# Altium PCB 1U 显示.PcbDoc
Units mil, origin at the board's own origin, x right, y up, seen from the top; angles counter-clockwise.
Board outline 5905.51 x 1456.69 mil, 4 copper layers (Top Layer, Layer 1, Layer 2, Bottom Layer), stack 70.211 mil thick; 52 components, 122 nets, 445 pads, 525 vias.
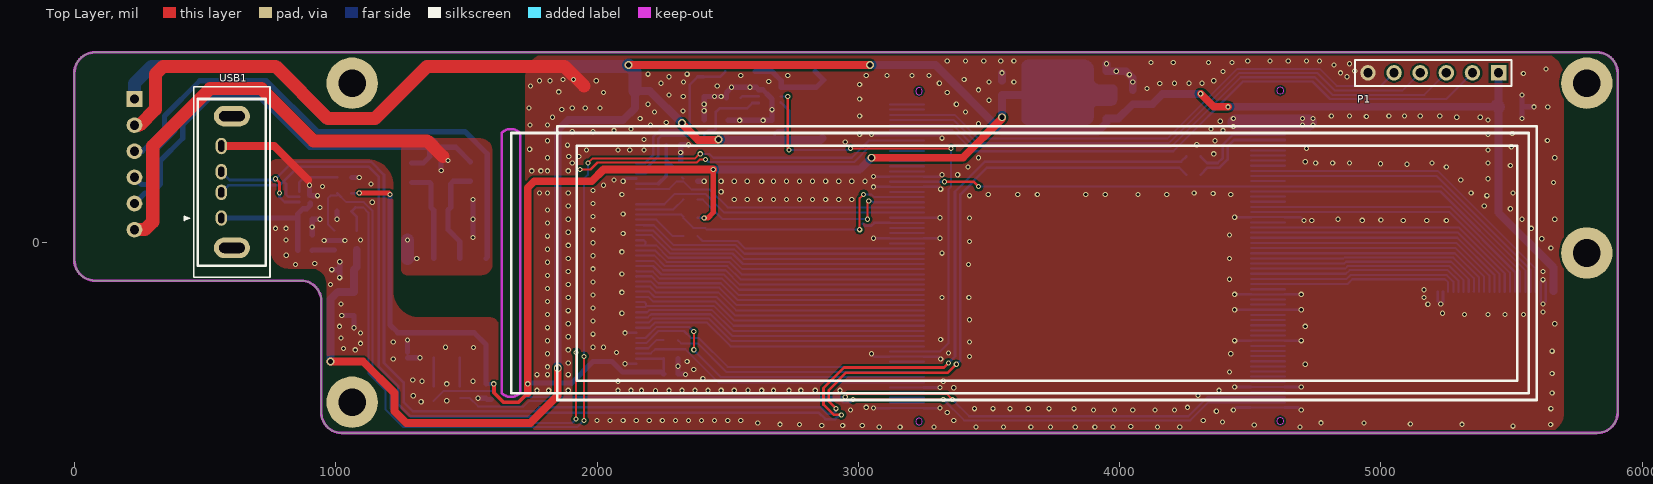
[diagram p0: Top Layer view]
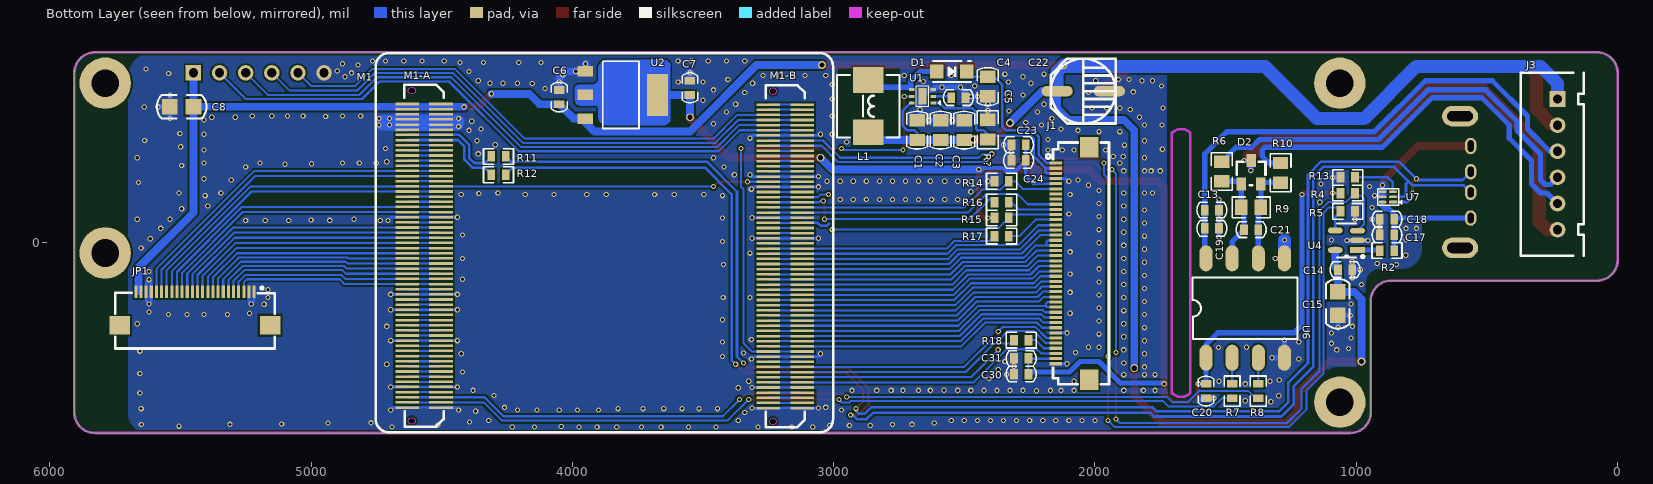
[diagram p1: Bottom Layer view, seen from below]

## Layer stack, top to bottom
Top Solder: solder mask 0.4, Solder Resist, Dk 3.5
Top Layer: signal copper 1.4
Dielectric 2: prepreg 2.8, PP-006, Dk 4.1
Layer 1: signal copper 1.378
Dielectric 1: dielectric 59.0551, FR-4, Dk 4.8
Layer 2: signal copper 1.378
Dielectric 3: prepreg 2.8, PP-006, Dk 4.1
Bottom Layer: signal copper 1.4
Bottom Solder: solder mask 0.4, Solder Resist, Dk 3.5

## Board outline
944.88,-223.74 ccw(c866.14,-223.74) 866.14,-145 78.74,-145 cw(c78.74,-66.26) 0,-66.26 0,649.61 cw(c78.74,649.61) 78.74,728.35 5826.77,728.35 cw(c5826.77,649.61) 5905.51,649.61 5905.51,-649.61 cw(c5826.77,-649.61) 5826.77,-728.35 1023.62,-728.35 cw(c1023.62,-649.61) 944.88,-649.61

## Design rules (kind name [scope] priority, off if disabled: settings)
Clearance [All] p1: gap=8 ignorepadtopadclearanceinfootprint=TRUE
DiffPairsRouting [All] p1: maxlimit=15 minlimit=10 mostfreqgap=10 toplayer_minwidth=10 toplayer_maxwidth=20 toplayer_prefwidth=15 midlayer1_minwidth=10 midlayer1_maxwidth=20 midlayer1_prefwidth=15 midlayer2_minwidth=10 midlayer2_maxwidth=20 midlayer2_prefwidth=15 bottomlayer_minwidth=10 bottomlayer_maxwidth=20 bottomlayer_prefwidth=15 maxuncoupledlength=500
HoleSize [All] p1: absolutevalues=TRUE maxlimit=300 minlimit=0 maxpercent=80.000 minpercent=20.000
HoleToHoleClearance [All] p1: gap=8 allowstackedmicrovias=TRUE
MatchedLengths can [InNetClass('CAN')] p1: tolerance=10 checknetsindiffpair=FALSE checkdiffpairvsdiffpair=TRUE checkxsignals=TRUE checkothers=TRUE
MinimumSolderMaskSliver [All] p1: minsoldermaskwidth=1
PlaneConnect [All] p1: pad.planeconnectstyle=Relief pad.reliefexpansion=20 pad.reliefentries=4 pad.reliefconductorwidth=10 pad.reliefairgap=10 via.planeconnectstyle=Direct via.reliefexpansion=20 via.reliefentries=4 via.reliefconductorwidth=10 via.reliefairgap=10
PolygonConnect [All] p1: connectstyle=Direct reliefconductorwidth=10 reliefentries=4 polygonreliefangle="90 Angle" airgapwidth=10
RoutingVias [All] p1: holewidth=12 width=20 viastyle="Through Hole" minholewidth=8 minwidth=12 maxholewidth=28 maxwidth=50
SilkToSilkClearance [All] p1: silktosilkclearance=0
SilkToSolderMaskClearance [IsPad] p1: minsilkscreentomaskgap=0 clearancetoexposedcopper=TRUE
SolderMaskExpansion [All] p1: expansion=4 istentingtop=FALSE
Width [All] p1: maxlimit=100 minlimit=8 preferedwidth=10
23 further rules are at their usual default settings.

## Classes and differential pairs
net class USB1: USB_H_D_N USB_H_D_P
net class CAN: CAN_N CAN_P
differential pair CAN: +CAN_P -CAN_N
differential pair USB_H_D: +USB_H_D_P -USB_H_D_N

## Components (designator, comment, footprint, x,y, rotation, side; value= is the part's Value field where it differs from the comment)
C1 "22uF 16V" C0805-M 2680.83,393.19 r90 bottom
C2 "10uF 25V" C0805-M 2590.83,393.19 r90 bottom
C3 "100nF 50V" C0805-M 2500.83,393.19 r90 bottom
C4 "10uF 25V" C0805-M 2410,635 r270 bottom
C5 "100nF 50V" C0603 2550,555 r0 bottom
C6 "10uF 10V" C0603 4050,530 r270 bottom
C7 "10uF 10V" C0603 3550,565 r270 bottom
C8 "10uF 25V" C0805 5450,520 r180 bottom
C13 "10uF 10V" C0603 1580,125 r0 bottom
C14 "100nF 50V" C0603 1015.39,-103.19 r180 bottom
C15 "10uF 25V" C0805 1070.39,-278.19 r270 bottom
C17 "4.7uF 25V" C0603 910,30 r0 bottom
C18 "100nF 50V" C0603 910,90 r0 bottom
C19 "104 0603" C0603 1580,55 r0 bottom
C20 "104 0603" C0603 1575,-595 r270 bottom
C21 "220 0603" C0603 1375,50 r180 bottom
C22 "220UF /16V" RB-.63 2145,580 r180 bottom
C23 "2.2uF 16V" C0603 2265,375 r180 bottom
C24 "100nF 50V" C0603 2320,315 r0 bottom
C30 "2.2uF 16V" C0603 2310,-502.83 r0 bottom
C31 "100nF 50V" C0603 2255,-442.83 r180 bottom
D1 "DIODE" SOD-123 2605,655 r180 bottom
D2 "NUP2105 LT1G" SOT-23 1440,225 r180 bottom
J1 "AFC24-S40FIA-00" FPC-SMD_P0.50-40P_H2.0 2150,304.65 r90 bottom locked
J3 "CON6" xh-6a 230,550 r270 bottom
JP1 "HEADER 12X2" FPC-SMD_P0.50-24P_H2.0 5217.63,-188.19 r180 bottom locked
L1 "22UH" L0520 2867.6,422.4 r90 bottom
M1 "H750-module" H750-module 4752.28,725 r180 bottom locked
P1 "Header 6" HDR1X6 5450,650 r180 top
R2 "0R 1%" R0603 910,-30 r180 bottom
R4 "10K 1%" R0603 1005,190 r0 bottom
R5 "10K 1%" R0603 1060,120 r180 bottom
R6 "10Ω 0805" R0805-M 1515,235 r90 bottom
R7 "100Ω 0603" R0603 1475,-540 r270 bottom
R8 "100Ω 0603" R0603 1375,-540 r270 bottom
R9 "nc" R0805-M 1440,135 r180 bottom
R10 "10Ω 0805" R0805-M 1290,230 r90 bottom
R11 "22R 1%" R0603 4255,330 r0 bottom
R12 "22R 1%" R0603 4255,260 r0 bottom
R13 "10K 1%" R0603 1005,250 r0 bottom
R14 "10K 1%" R0603 2385,235 r180 bottom
R15 "10K 1%" R0603 2385,95 r180 bottom
R16 "22R 1%" R0603 2385,155 r180 bottom
R17 "22R 1%" R0603 2385,25 r180 bottom
R18 "22R 1%" R0603 2310,-372.83 r180 bottom
R? "5R" R0805-M 2410,470 r270 bottom
U1 "TPS61160DRVR" WSON-6-EP(2x2) 2660,560 r0 bottom
U2 "LM1117-3.3V" SOT-223 3950,656.1 r270 bottom
U4 "TPS2051BDBVR" SOT-23-5 995.39,-28.19 r0 bottom
U6 "ISO1050DUBR" DIP-8/STM 1575,-440 r90 bottom
U7 "TPD4S012DRYR" DRY-6 873.46,175.32 r90 bottom
USB1 "USB" USB-101 602.83,232.2 r90 top locked

## Footprints (in the part's own frame and the unit in brackets; to place one, negate y for a bottom-side part, rotate by r counter-clockwise, add the part's x,y. Pads: shape width x height; smd on the part's side, far side on the other; paste and mask are expansions set on the pad)
C0603 [mil]
  rect 30x40 smd: 1(0,0) 2(-55,0)
  silkscreen extent -85,-30 30,30, body extent -79,-19 24,20, height 34
C0805 [mil]
  rect 60x60 smd: 1(0,0) 2(-90,0)
  silkscreen extent -140,-45 50,45, body extent -104,-28 14,27, height 36
C0805-M [mm]
  rect 1.2x1.5 smd: 1(0,0) 2(1.905,0)
  silkscreen extent -0.88,-1.02 2.78,1.02, body extent -0.61,-0.68 2.39,0.72, height 0.9
DIP-8/STM [mil]
  oval 100x50 smd: 1(0,0) 2(0,-100) 3(0,-200) 4(0,-300) 5(380,-300) 6(380,-200) 7(380,-100) 8(380,0)
  silkscreen extent 71,-350 307,51
DRY-6 [mil] "DRY-6"
  rect 10x30 smd: 1(-19.68,-13.46)
  oval 10x30 smd: 2(0,-13.46) 3(19.68,-13.46) 4(19.68,26.06) 5(0,26.06) 6(-19.68,26.06)
  silkscreen extent -32,-47 32,45
FPC-SMD_P0.50-24P_H2.0 [mm]
  rect 0.3x1.2 smd paste+0 mask+0.05: 1(0,0) 2(-0.5,0) 3(-1,0) 4(-1.5,0) 5(-2,0) 6(-2.5,0) 7(-3,0) 8(-3.5,0) 9(-4,0) 10(-4.5,0) 11(-5,0) 12(-5.5,0) 13(-6,0) 14(-6.5,0) 15(-7,0) 16(-7.5,0) 17(-8,0) 18(-8.5,0) 19(-9,0) 20(-9.5,0) 21(-10,0) 22(-10.5,0) 23(-11,0) 24(-11.5,0)
  rect 2x1.8 smd paste+0 mask+0.05: 25(-13.05,-3.25) 26(1.55,-3.25)
  silkscreen extent -13.5,-5.5 2,0.5
FPC-SMD_P0.50-40P_H2.0 [mm]
  rect 0.3x1.2 smd paste+0 mask+0.05: 1(0,0) 2(-0.5,0) 3(-1,0) 4(-1.5,0) 5(-2,0) 6(-2.5,0) 7(-3,0) 8(-3.5,0) 9(-4,0) 10(-4.5,0) 11(-5,0) 12(-5.5,0) 13(-6,0) 14(-6.5,0) 15(-7,0) 16(-7.5,0) 17(-8,0) 18(-8.5,0) 19(-9,0) 20(-9.5,0) 21(-10,0) 22(-10.5,0) 23(-11,0) 24(-11.5,0) 25(-12,0) 26(-12.5,0) 27(-13,0) 28(-13.5,0) 29(-14,0) 30(-14.5,0) 31(-15,0) 32(-15.5,0) 33(-16,0) 34(-16.5,0) 35(-17,0) 36(-17.5,0) 37(-18,0) 38(-18.5,0) 39(-19,0) 40(-19.5,0)
  rect 2x1.8 smd paste+0 mask+0.05: 41(-21.05,-3.25) 42(1.55,-3.25)
  silkscreen extent -21.5,-5.17 2,0.94
H750-module [mm]
  rect 2.3x0.25 smd paste+0 mask+0.05: A1(3.048,-4.936) A2(6.348,-4.936) A3(3.048,-5.436) A4(6.348,-5.436) A5(3.048,-5.936) A6(6.348,-5.936) A7(3.048,-6.436) A8(6.348,-6.436) A9(3.048,-6.936) A10(6.348,-6.936) A11(3.048,-7.436) A12(6.348,-7.436) A13(3.048,-7.936) A14(6.348,-7.936) A15(3.048,-8.436) A16(6.348,-8.436) A17(3.048,-8.936) A18(6.348,-8.936) A19(3.048,-9.436) A20(6.348,-9.436) A21(3.048,-9.936) A22(6.348,-9.936) A23(3.048,-10.436) A24(6.348,-10.436) A25(3.048,-10.936) A26(6.348,-10.936) A27(3.048,-11.436) A28(6.348,-11.436) A29(3.048,-11.936) A30(6.348,-11.936) A31(3.048,-12.436) A32(6.348,-12.436) A33(3.048,-12.936) A34(6.348,-12.936) A35(3.048,-13.436) A36(6.348,-13.436) A37(3.048,-13.936) A38(6.348,-13.936) A39(3.048,-14.436) A40(6.348,-14.436) A41(3.048,-14.936) A42(6.348,-14.936) A43(3.048,-15.436) A44(6.348,-15.436) A45(3.048,-15.936) A46(6.348,-15.936) A47(3.048,-16.436) A48(6.348,-16.436) A49(3.048,-16.936) A50(6.348,-16.936) A51(3.048,-17.436) A52(6.348,-17.436) A53(3.048,-17.936) A54(6.348,-17.936) A55(3.048,-18.436) A56(6.348,-18.436) A57(3.048,-18.936) A58(6.348,-18.936) A59(3.048,-19.436) A60(6.348,-19.436) A61(3.048,-19.936) A62(6.348,-19.936) A63(3.048,-20.436) A64(6.348,-20.436) A65(3.048,-20.936) A66(6.348,-20.936) A67(3.048,-21.436) A68(6.348,-21.436) A69(3.048,-21.936) A70(6.348,-21.936) A71(3.048,-22.436) A72(6.348,-22.436) A73(3.048,-22.936) A74(6.348,-22.936) A75(3.048,-23.436) A76(6.348,-23.436) A77(3.048,-23.936) A78(6.348,-23.936) A79(3.048,-24.436) A80(6.348,-24.436) A81(3.048,-24.936) A82(6.348,-24.936) A83(3.048,-25.436) A84(6.348,-25.436) A85(3.048,-25.936) A86(6.348,-25.936) A87(3.048,-26.436) A88(6.348,-26.436) A89(3.048,-26.936) A90(6.348,-26.936) A91(3.048,-27.436) A92(6.348,-27.436) A93(3.048,-27.936) A94(6.348,-27.936) A95(3.048,-28.436) A96(6.348,-28.436) A97(3.048,-28.936) A98(6.348,-28.936) A99(3.048,-29.436) A100(6.348,-29.436) A101(3.048,-29.936) A102(6.348,-29.936) A103(3.048,-30.436) A104(6.348,-30.436) A105(3.048,-30.936) A106(6.348,-30.936) A107(3.048,-31.436) A108(6.348,-31.436) A109(3.048,-31.936) A110(6.348,-31.936) A111(3.048,-32.436) A112(6.348,-32.436) A113(3.048,-32.936) A114(6.348,-32.936) A115(3.048,-33.436) A116(6.348,-33.436) A117(3.048,-33.936) A118(6.348,-33.936) A119(3.048,-34.436) A120(6.348,-34.436) B1(38.151,-4.986) B1(38.151,-4.986) B2(41.451,-4.986) B2(41.451,-4.986) B3(38.151,-5.486) B4(41.451,-5.486) B5(38.151,-5.986) B6(41.451,-5.986) B7(38.151,-6.486) B8(41.451,-6.486) B9(38.151,-6.986) B10(41.451,-6.986) B11(38.151,-7.486) B12(41.451,-7.486) B13(38.151,-7.986) B14(41.451,-7.986) B15(38.151,-8.486) B16(41.451,-8.486) B17(38.151,-8.986) B18(41.451,-8.986) B19(38.151,-9.486) B20(41.451,-9.486) B21(38.151,-9.986) B22(41.451,-9.986) B23(38.151,-10.486) B24(41.451,-10.486) B25(38.151,-10.986) B26(41.451,-10.986) B27(38.151,-11.486) B28(41.451,-11.486) B29(38.151,-11.986) B30(41.451,-11.986) B31(38.151,-12.486) B32(41.451,-12.486) B33(38.151,-12.986) B34(41.451,-12.986) B35(38.151,-13.486) B36(41.451,-13.486) B37(38.151,-13.986) B38(41.451,-13.986) B39(38.151,-14.486) B40(41.451,-14.486) B41(38.151,-14.986) B42(41.451,-14.986) B43(38.151,-15.486) B44(41.451,-15.486) B45(38.151,-15.986) B46(41.451,-15.986) B47(38.151,-16.486) B48(41.451,-16.486) B49(38.151,-16.986) B50(41.451,-16.986) B51(38.151,-17.486) B52(41.451,-17.486) B53(38.151,-17.986) B54(41.451,-17.986) B55(38.151,-18.486) B56(41.451,-18.486) B57(38.151,-18.986) B58(41.451,-18.986) B59(38.151,-19.486) B60(41.451,-19.486) B61(38.151,-19.986) B62(41.451,-19.986) B63(38.151,-20.486) B64(41.451,-20.486) B65(38.151,-20.986) B66(41.451,-20.986) B67(38.151,-21.486) B68(41.451,-21.486) B69(38.151,-21.986) B70(41.451,-21.986) B71(38.151,-22.486) B72(41.451,-22.486) B73(38.151,-22.986) B74(41.451,-22.986) B75(38.151,-23.486) B76(41.451,-23.486) B77(38.151,-23.986) B78(41.451,-23.986) B79(38.151,-24.486) B80(41.451,-24.486) B81(38.151,-24.986) B82(41.451,-24.986) B83(38.151,-25.486) B84(41.451,-25.486) B85(38.151,-25.986) B86(41.451,-25.986) B87(38.151,-26.486) B88(41.451,-26.486) B89(38.151,-26.986) B90(41.451,-26.986) B91(38.151,-27.486) B92(41.451,-27.486) B93(38.151,-27.986) B94(41.451,-27.986) B95(38.151,-28.486) B96(41.451,-28.486) B97(38.151,-28.986) B98(41.451,-28.986) B99(38.151,-29.486) B100(41.451,-29.486) B101(38.151,-29.986) B102(41.451,-29.986) B103(38.151,-30.486) B104(41.451,-30.486) B105(38.151,-30.986) B106(41.451,-30.986) B107(38.151,-31.486) B108(41.451,-31.486) B109(38.151,-31.986) B110(41.451,-31.986) B111(38.151,-32.486) B112(41.451,-32.486) B113(38.151,-32.986) B114(41.451,-32.986) B115(38.151,-33.486) B116(41.451,-33.486) B117(38.151,-33.986) B118(41.451,-33.986) B119(38.151,-34.486) B120(41.451,-34.486)
  Keep-Out Layer board cut-out: 3.498,-3.311 3.563,-3.311 3.682,-3.36 3.774,-3.451 3.823,-3.571 3.823,-3.635 3.823,-3.7 3.774,-3.82 3.682,-3.911 3.563,-3.96 3.498,-3.96 3.433,-3.96 3.314,-3.911 3.222,-3.82 3.173,-3.7 3.173,-3.635 3.173,-3.571 3.222,-3.451 3.314,-3.36 3.433,-3.311 3.498,-3.311
  Keep-Out Layer board cut-out: 3.498,-35.411 3.563,-35.411 3.682,-35.46 3.774,-35.551 3.823,-35.671 3.823,-35.736 3.823,-35.8 3.774,-35.92 3.682,-36.011 3.563,-36.061 3.498,-36.061 3.433,-36.061 3.314,-36.011 3.222,-35.92 3.173,-35.8 3.173,-35.736 3.173,-35.671 3.222,-35.551 3.314,-35.46 3.433,-35.411 3.498,-35.411
  Keep-Out Layer board cut-out: 38.601,-4.011 38.536,-4.011 38.417,-3.962 38.325,-3.87 38.276,-3.751 38.276,-3.686 38.276,-3.622 38.325,-3.502 38.417,-3.411 38.536,-3.361 38.601,-3.361 38.665,-3.361 38.785,-3.411 38.876,-3.502 38.926,-3.622 38.926,-3.686 38.926,-3.751 38.876,-3.87 38.785,-3.962 38.665,-4.011 38.601,-4.011
  Keep-Out Layer board cut-out: 38.601,-36.111 38.536,-36.111 38.417,-36.062 38.325,-35.97 38.276,-35.851 38.276,-35.786 38.276,-35.722 38.325,-35.602 38.417,-35.511 38.536,-35.461 38.601,-35.461 38.665,-35.461 38.785,-35.511 38.876,-35.602 38.926,-35.722 38.926,-35.786 38.926,-35.851 38.876,-35.97 38.785,-36.062 38.665,-36.111 38.601,-36.111
  silkscreen extent 0,-36.83 44.45,0, body extent 2.38,-36.31 42.09,-3.05, height 2.5
HDR1X6 [mm] "Connector; Header; 6 Position"
  rect 1.5x1.5 hole 0.9: 1(0,0)
  round 1.5 hole 0.9: 2(2.54,0) 3(5.08,0) 4(7.62,0) 5(10.16,0) 6(12.7,0)
  silkscreen extent -1.27,-1.27 13.97,1.27
L0520 [mm]
  rect 2.5x3 smd: 1(0,0) 2(5.08,0)
  silkscreen extent -0.51,-3.05 5.59,3.05
R0603 [mil]
  rect 30x40 smd: 1(0,0) 2(55,0)
  silkscreen extent -30,-30 85,30, body extent -3,-15 59,17, height 18
R0805-M [mm]
  rect 1.2x1.5 smd: 1(0,0) 2(1.905,0)
  silkscreen extent -0.89,-1.02 2.79,1.02, body extent -0.6,-0.7 2.4,0.7, height 0.53
RB-.63 [mil]
  oval 120x40 smd: 1(0,0) 2(200,0)
  silkscreen extent -24,-124 224,124
SOD-123 [mm]
  rect 1.3x1.4 smd: A(0,0) K(2.9,0)
  silkscreen extent -0.38,-1.02 3.3,1.02, body extent 0.15,-0.71 2.65,0.64, height 1.05
SOT-23 [mil]
  rect 36x50 smd: 1(0,0) 2(75,0) 3(37.5,90)
  silkscreen extent -17,-5 93,85, body extent -20,-2 95,95, height 39
SOT-23-5 [mm]
  rect 1.45x0.55 smd: 1(0,0)
  oval 1.45x0.55 smd: 2(0,-0.94) 3(0,-1.89) 4(2.159,-1.905) 5(2.159,0)
  silkscreen extent -0.63,-2.59 1.97,0.76, body extent -0.39,-2.39 2.41,0.51, height 1.09
SOT-223 [mil]
  rect 40x60 smd: 1(0,0) 2(90.55,0) 3(181.1,0)
  rect 160x80 smd: 4(90.55,275.59)
  silkscreen extent -38,67 219,205, body extent -38,-1 218,273, height 67
USB-101 [mm] "USB-101"
  oval 1.5x1.1 hole 0.6 slot 1 at 0 deg: 1(-3.5,1.03) 2(-1,1.03) 3(1,1.03)
  oval 1.6x1.1 hole 0.6 slot 1.1 at 0 deg: 4(3.5,1.03)
  oval 2x3.5 hole 1 slot 2.5 at 90 deg: 5(-6.4,0) 6(6.4,0)
  silkscreen extent -9.25,-3.7 9.25,4.61
WSON-6-EP(2x2) [mm]
  rect 0.5x0.3 smd: 1(-1.05,0.65) 2(-1.05,0) 3(-1.05,-0.65) 4(1.05,-0.65) 5(1.05,0) 6(1.05,0.65)
  rect 0.8x1.6 smd: 7(0,0)
  silkscreen extent -1.7,-1 0.6,1
xh-6a [mil]
  rect 60x60 hole 36: 1(0,0)
  round 60 hole 36: 2(100,0) 3(200,0) 4(300,0) 5(400,0) 6(500,0)
  silkscreen extent -100,-140 600,100

## Part data
C1: library part "22uF 0805 16V", "贴片电容", LCSC=C116973, Type="22uF ±20% 16V"
C2 C4 C8: library part "10uF 0805 25V", "贴片电容", LCSC=C15850, Type="10uF (106) ±10% 25V X5R"
C3: library part "100nF 0805 50V", "贴片电容", LCSC=C49678, Type="100nF(104) ±10% 50V X7R"
C5 C24 C31: library part "100nF 0603 50V", "贴片电容", LCSC=C14663, Type="100nF (104) ±10% 50V X7R"
C6 C7 C13: library part "10uF 0603 10V", "贴片电容", LCSC=C19702, Type="10uF (106) ±10% 10V X5R"
C14 C15 C17 C18: library part Cap, "电容", Co.Number=.................
C19 C20 C21: library part C_0603, "无极性贴片电容_0603"
C22: library part ELECTR, UNIT=110101700510X, UNIT-TYPE="(CD)贴片电解电容Chip Cap 220uF 士20%/16V，Φ6.3×7.7(RoHS)"
C23 C30: library part "2.2uF 0603 16V", "贴片电容", LCSC=C23630, Type="2.2uF   ±10% 16V X5R"
D2: library part "NUP2105 SOT-23", "CAN ESD", Type=NUP2105LT1G，SOT-23，ON
J1: "FPC 40PIN 0.5mm", Symbol=AFC24-S40FIA-00
J3: "Connector"
L1: library part INDUCTOR
M1: "H750核心板"
P1: "Header, 6-Pin", LatestRevisionDate=17-Jul-2002, LatestRevisionNote="Re-released for DXP Platform.", Publisher="Altium Limited"
R2 R4 R5 R13: library part Res2, "Resistor"
R6 R7 R8 R9 R10: library part R_0603, "贴片电阻_0603封装"
R11 R12 R16 R17 R18: library part "22R 1% 0603", "贴片电阻", LCSC=C23345, Type="22R ±1% 0603"
R14 R15: library part "10K 1% 0603", "贴片电阻", LCSC=C25804, Type="10K ±1% 0603"
R?: library part RES
U1: "LCD 背光驱动", Input Voltage=2.7V~18V, JLCPCB Part Class=扩展库, Manufacturer=TI(德州仪器), Operating Temperature=-40℃~+85℃, Output Current=700mA, Output Voltage=26V, Switch Frequency=600kHz, Add into BOM=yes, Channels=1, Convert to PCB=yes, Datasheet=https://www.ti.com/cn/lit/gpn/tps61160, Device=TPS61160DRVR, Dimming=PWM, LCSC Part Name=TPS61160DRVR, Manufacturer Part=TPS61160DRVR, Supplier=LCSC, Supplier Footprint=WSON-6-EP(2x2), Supplier Part=C165143, Symbol=TPS61160DRVR, Topology=升压, Type=DC-DC稳压器
U2: library part "LM1117-3.3V SOT-223", "线性稳压", LCSC=C6186, Type=LM1117-3.3V，SOT-223，3.3V
U7: library part TPD4S012, "USB OTG ESD保护", UNIT=110100200883X, UNIT-TYPE="(CD)IC USB ESD保护芯片 TPD4S012DRYR SON-6 \"TI\"牌(RoHS)"
U4: UNIT=110100200895X, UNIT_TYPE=(CD)IC/贴片/USB限流配电开关/TPS2051BDBVR/SOT-23/TI
U6: Type="ISO1050DUBR ,SOP-8DUB,TI"

## Free pads (board coordinates)
  round 196.85 hole 106.3: 4(1062.99,-610.24) 4(1062.99,610.24) 4(5787.4,-39.37) 4(5787.4,610.24)

## Via types
v1: diameter 20, hole 12, Top Layer to Bottom Layer, tented both sides, 517 vias
v2: diameter 30, hole 20, Top Layer to Bottom Layer, tented both sides, 8 vias

## Nets (pads, with @x,y where several pads share a name; then routed paths per layer and width w, separated by ;. In a path a pad name is that pad's centre, name@x,y a point inside that pad or via, vN(x,y) a via of type N, cw(c..) or ccw(c..) an arc to the next point about the centre after c; other vN are vias at no path point)
5V: C1.1 C2.1 C3.1 C6.1 C8.1 C14.2 C15.2 C22.1 J3.1 JP1.23 JP1.24 L1.1 M1.A1 M1.A2 M1.A3 M1.A4 P1.1 U1.6 U2.3 U4.5 | length 10667
  Top Layer w30: v2(980,-455) 1105,-455 1225,-575 1225,-645 1270,-690 1745,-690 1850,-585 v2(1850,-480) ; v2(2120,680) v2(3045,680) ; v2(2325,458) 2325,455 2386.81,393.19 2463.19,393.19 v2(2465,395) ; v1(4310,570) 4360,520 v1(4415,520)
  Bottom Layer w10: C1.1 2680.83,420.83 2690,430 2717.64,430 2735,447.36 2735,505 U1.6@2703.46,536.54
  Bottom Layer w30: v2(980,-455) 980,-216.38 1008.19,-188.19 C15.2 C14.2 1080.39,-93.19 U4.5 ; v2(1850,-480) 1850,430 1890,470 2100,470 2145,515 C22.1 2203,580 v2(2325,458) ; v2(2465,395) 2499.02,395 C3.1 C2.1 C1.1 2855.47,393.19 L1.1@2862.28,400 ; v2(3045,680) 3295,680 3550,425 3915,425 3950,460 U2.3 3995,475 C6.1 4125,530 4164.53,569.53 4310.47,569.53 v1(4310,570) ; v1(4415,520) 5440,520 5445,525 5450,530 P1.1 ; C8.1 5450,115 5660,-95 5660,-185
  Bottom Layer w50: J3.1 230,610 295,675 770,675 970,475 1150,475 1350,675 2115,675 v2(2120,680) 2145,655 C22.1 ; C8.1@5445,525 C8.1
573_LE1: JP1.11 M1.A55 M1.A56 | length 1025.8
  Bottom Layer w8: M1.A56 M1.A55 5288.69,-0.81 5414.48,-126.6 JP1.11
573_LE2: JP1.12 M1.A53 M1.A54 | length 1185.3
  Bottom Layer w8: JP1.12 5434.17,-123.66 5291.64,18.87 M1.A53 ; M1.A53 M1.A54 M1.A53
+5V_CAN: C13.1 C19.1 J3.3 U6.8 | length 2009.2
  Bottom Layer w20: J3.3 260,350 345,435 345,455 345,485 480,620 735,620 930,425 1495,425 1580,340 C13.1 C19.1 1580,-55 U6.8
BAT: M1.B1 M1.B2 | length 129.9
  Bottom Layer w8: M1.B2@3120.36,528.69 M1.B1@3250.28,528.69
BOOT0: JP1.18 M1.A33 M1.A34 M1.B31 M1.B32 | length 2655.3
  Top Layer w10: v1(3330,233.41) 3441.59,233.41 v1(3460,215)
  Bottom Layer w8: M1.B32 M1.B31 v1(3330,233.41) ; v1(3460,215) 3460.72,215.72 M1.A34 M1.A33 5230.55,215.72 5552.28,-106.01 JP1.18
CAN_N: J3.5 R10.2 | length 1568
  Bottom Layer w20: J3.5 270,190 295,190 330,225 330,315 415,400 415,450 520,555 710,555 900,365 1350,365 1360,355 1360,330 1335,305 R10.2
CAN_P: J3.4 R6.2 | length 1639.5
  Bottom Layer w20: J3.4 257.5,222.5 277.5,222.5 295,240 295,340 385,430 385,465 505,585 725,585 915,395 1370,395 1400,365 1460,365 R6.2
Encoder_A: JP1.20 M1.A27 M1.A28 | length 1332.6
  Bottom Layer w8: M1.A28 M1.A27 5216.75,274.78 5591.65,-100.12 JP1.20
Encoder_B: JP1.19 M1.A29 M1.A30 | length 1433
  Bottom Layer w8: JP1.19 5571.96,-103.06 5213.81,255.09 M1.A29 ; M1.A29 M1.A30 M1.A29
GND: C1.2 C2.2 C3.2 C4.2 C5.2 C6.2 C7.2 C8.2 C14.1 C15.1 C17.1 C18.1 C20.1 C22.2 C23.2 C24.1 C30.1 C31.2 J1.4 J1.34 J1.40 J3.2 JP1.1 JP1.2 JP1.21 JP1.22 M1.A5 M1.A6 M1.A7 M1.A8 M1.A9 M1.A10 M1.A11 M1.A12 M1.A45 M1.A46 M1.A75 M1.A76 M1.A81 M1.A82 M1.A93 M1.A94 M1.A111 M1.A112 M1.A119 M1.A120 M1.B13 M1.B14 M1.B29 M1.B30 M1.B33 M1.B34 M1.B45 M1.B46 M1.B53 M1.B54 M1.B99 M1.B100 M1.B111 M1.B112 M1.B119 M1.B120 P1.6 R5.2 R13.2 R14.1 R?.1 U1.3 U1.7 U2.1 U4.2 U6.4 U7.4 U7.5 USB1.4 | length 9350.2
  Top Layer w30: USB1.4 765,370 895,240
  Top Layer w50: J3.2 250,450 310,510 310,645 340,675 770,675 970,475 1150,475 1350,675 1875,675 1950,600
  Bottom Layer w8: M1.B120 M1.B119 ; M1.B112 M1.B111 ; M1.B100 M1.B99 ; M1.B46 M1.B45 ; M1.B34 M1.B33 ; M1.B30 M1.B29 ; M1.B14 M1.B13 ; M1.A120 M1.A119 ; M1.A112 M1.A111 ; M1.A76 M1.A75 ; M1.A46 M1.A45 ; M1.A12 M1.A11 ; M1.A10 M1.A9 ; M1.A8 M1.A7 ; M1.B54 M1.B53 M1.B54 ; M1.A94 M1.A93 M1.A94 ; M1.A82 M1.A81 M1.A82
  Bottom Layer w10: v1(2100,235) 2100.26,235 2110.86,245.6 J1.4 ; v1(2106.93,-463.07) J1.40 ; v1(2106.93,-344.96) J1.34 ; v1(3050,-425) 3050,-425.4 3060.48,-435.88 M1.B100 ; v1(3050,415) 3052.71,415 3057.13,410.57 M1.B14 ; v1(3058,-632.73) M1.B120 ; v1(3058,16.87) M1.B54 ; v1(3058,213.72) M1.B34 ; v1(3058,253.09) M1.B30 ; M1.B119 v1(3312.65,-632.73) ; M1.B111 v1(3312.65,-553.99) ; M1.B99 3304.14,-435.88 3313.26,-445 v1(3315,-445) ; M1.B53 v1(3312.65,16.87) ; M1.B45 v1(3312.65,95.61) ; M1.B33 3304.14,213.72 3312.87,205 v1(3315,205) ; M1.B29 3310.39,253.09 3317.29,260 v1(3320,260) ; M1.B13 3309.43,410.57 v1(3320,400) ; v1(4435,-640) 4436.22,-640 4445.48,-630.74 M1.A120 ; v1(4440,-552) M1.A112 ; v1(4440,-374.83) M1.A94 ; v1(4440,-256.71) M1.A82 ; v1(4440,-197.66) M1.A76 ; v1(4440,97.61) M1.A46 ; M1.A119 4684.14,-630.74 4693.4,-640 v1(4695,-640) ; M1.A111 v1(4694.65,-552) ; M1.A93 v1(4694.65,-374.83) ; M1.A81 v1(4694.65,-256.71) ; M1.A75 v1(4694.65,-197.66) ; M1.A45 4692.39,97.61 v1(4705,85) ; JP1.1 5217.63,-223.98 v1(5228.66,-235) 5237.32,-226.33 JP1.2 ; 5611.33,-226.33 v1(5620,-235) 5631.02,-223.98 JP1.22 5631.02,-152.4 v1(5620,-141.38) 5611.33,-150.05 JP1.21 5611.33,-226.33
  Bottom Layer w20: v1(900,220) 900,180.36 900.04,180.32 911.44,180.32 911.44,180 v1(930,180) ; C17.1 v1(910,60) C18.1 v1(940,90) ; v1(955.79,8.81) U4.2 v1(1035,8.81) ; v1(985,-103.19) C14.1 v1(1015.39,-72.8) ; v1(1005,90) R5.2 ; v1(1015.17,-133.82) C14.1@1015.17,-103.42 ; v1(1023.19,-278.19) C15.1 v1(1070.39,-325.39) ; R13.2 v1(1090,250) ; U6.4 v1(1322.2,-440) ; U6.4@1275,-420 v1(1275,-372.8) ; v1(1545,-595) C20.1 1580,-600 1595,-600 ; C31.2 v1(2310,-472.83) C30.1 2337.83,-502.83 v1(2338.91,-503.91) v1@2340,-505 ; C24.1 v1(2320,345) C23.2 v1(2350,375) ; R14.1 v1(2410,235) ; R?.1 v1(2410,505) v1(2410,530) C4.2 v1(2450,560) v1(2475,560) 2490,560 C5.2 2495,575 v1(2515,595) v1(2585,595) 2609.25,595 U1.3 2634.41,585.59 U1.7 2670,550 v1(2670,509.09) 2670,468.19 v1(2635.83,468.19) C2.2 v1(2545.83,468.19) C3.2 ; v1(5540,475) C8.2 ; v1(5540,565) C8.2 ; v1(5585,520) C8.2
  Bottom Layer w30: C7.2 v1(3550,650) ; v1(3950,685) U2.1 v1(3986.95,656.1) 4023.9,656.1 v1(4036.95,643.05) 4050,630 v1(4050,615) C6.2
  Bottom Layer w50: 4725,460 4730,460
  Bottom Layer w60: 4443.12,460 4725,460
  other v1: 3080,-705 3160,-705 3290,-705 3450,-705 3555,-705 3660,-705 3735,-705 3830,-705 3905,-705 3975,-705 4145,-705 4230,-705 4690,-705 4042.39,-703.26 5505.13,-701.97 2860,-700 2940,-700 3015,-700 4515.14,-697.22 2700,-695 2774.51,-695.93 5310,-695 5649.28,-695.63 5112.3,-694.05 2615,-690 4935,-690 4770.16,-689.3 4393.17,-686.13 2000,-680 2050,-680 2100,-680 2150,-680 2200,-680 2250,-680 2300,-680 2350,-680 2400,-680 2450,-680 2500,-680 2550,-680 3365,-680 4320,-680 3340,-650 4370,-645 2970,-640 3900,-640 3980,-640 4050,-640 4135,-640 4210,-640 3445,-635 3515,-635 3580,-635 3650,-635 3730,-635 3825,-635 5650,-635 3030,-630 4260,-630 1327.01,-608.79 1425,-605 1296.66,-585.87 4300,-585 5655,-575 2223.59,-566.64 1770,-565 1815,-565 1890,-565 2080,-565 2130,-565 2170,-565 2275,-565 2325,-565 2375,-565 2425,-565 2475,-565 2525,-565 2630,-565 2675,-565 2735,-565 2780,-565 2835,-565 2930,-565 4380,-565 2577.26,-564.38 3365,-555 1425,-540 1330,-530 1525,-530 2080,-530 3325,-530 1295,-525 2405,-520 1770,-505 1810,-505 1890,-505 5655,-500 4420,-495 2370,-485 1810,-475 4710,-465 1890,-460 2345,-455 1220,-445 3425,-435 1810,-425 4425,-425 3345.25,-422.57 2075,-420 5655,-415 1075,-410 1890,-410 1030,-405 1420,-400 1527.06,-400.82 1985,-400 2025,-400 1095,-385 1220,-380 3425,-380 1810,-375 3315,-370 1020,-365 1890,-360 1985,-350 1095,-345 1810,-325 1015,-320 4710,-320 1890,-310 5665,-310 1985,-300 3425,-295 1810,-275 5320,-275 5410,-275 5475,-275 5545,-275 2095,-270 5235,-270 5620,-265 1890,-260 1985,-250 1020,-235 5179.28,-235.57 1810,-225 1890,-210 3320,-210 5165,-210 3422.85,-209.34 1985,-200 2095,-190 5165,-180 1810,-175 980,-160 1890,-160 1985,-150 4420,-140 1810,-125 2095,-120 1890,-110 5620,-110 1985,-100 846.38,-83.31 3421.58,-83.81 920,-80 1810,-75 1890,-60 4420,-60 1985,-50 810.85,-47.78 3320,-40 2095,-35 1810,-25 5650,-20 1890,-10 1985,0 3425,5 810,10 1095,10 5615,15 1810,25 4420,30 2100,35 1890,40 1985,50 770,55 810,55 5575,55 1810,75 4735,85 5085,85 5175,85 5250,85 4928.49,85.61 4999.41,86.85 1890,90 4835,90 5540,90 5665,90 3425,95 1985,100 2100,110 1810,125 5495,130 940,135 1890,140 5395,140 1985,150 1140,155 2525,165 2575,165 2625,165 2675,165 2725,165 2775,165 2825,165 2875,165 2925,165 2975,165 3425,180 5405,180 2095,185 3497.29,184.93 3610,185 3685,185 3870,185 3945,185 4070,185 4180,185 4425,185 4357.76,188.09 1780,190 1810,190 1890,190 4285,190 5345,190 5505,190 2475,195 1985,200 950,215 2025,220 1135,225 5660,230 2475,235 2525,235 2575,235 2630,235 2675,235 2725,235 2775,235 2825,235 2875,235 2925,235 2975,235 3025,235 2065,240 5305,240 5410,245 3380,260 1750,275 1785,275 1810,275 1890,275 3420,290 5250,290 5495,295 5100,300 4998.28,302.27 1905,305 4750,305 4815,305 4880,305 5195,305 5410,305 4710,310 1810,325 3460,325 5665,325 1930,330 1891.99,330.22 4360,340 1960,355 2080,355 2125,355 2180,355 5410,355 1742.15,357.89 4715,360 5498.8,367.23 1886.86,373.22 4295,375 2950,385 1810,390 4365,390 5636.6,390.99 2180,395 3005,415 5410,415 5501.96,417.92 1905,425 1985,425 2065,430 4395,430 2130,435 4350,435 4435,445 1743.43,449.93 1810,450 2205,450 4700,450 4740,450 3460,455 2265,460 4385,465 5410,470 2165,475 4435,475 4700,475 4740,475 1830,480 5290,480 5380,480 4943.91,483.03 3005,485 4810,485 4880,485 5030,485 5150,485 5225,485 5089.63,485.37 2220,500 3410,500 2329.09,504.16 1865,510 1740,515 1905,515 1955,515 2011.38,515.71 5638.19,519.29 2195,530 3375,530 3500,545 3005,550 2330,560 2275,565 2025,575 3340,575 1853.48,577.33 3460,585 4105,590 1745,600 2460,600 3005,605 2245,610 3310,610 4153.62,609.55 4210,610 4265,610 4315,610 2331.02,614.55 3500,615 3595,615 2657.38,617.04 1780,620 1820,620 1997.26,619.69 4360,620 1870,625 1910,625 3405,625 2275,635 4870,635 2550,640 2730,640 3030,640 3110,640 3205,640 3270,640 2195,645 2345,645 5544.73,647.59 4845,650 4395,655 4899.4,656.7 5631.85,665.02 4820,680 4880,685 4120,690 4205,690 4340,690 4430,690 3340,695 3410,695 3480,695 3545,695 3595,695 4490,695 4575,695 4645,695 4715,695 4765,695
GND_CAN: C13.2 C19.2 D2.3 J3.6 U6.5 | length 1999.8
  Top Layer w50: J3.6 270,50 300,80 300,370 520,590 715,590 915,390 1350,390 1410,330
  Bottom Layer w20: U6.5 v1(1310,-60) ; v1@1405,275 1402.5,277.5 D2.3 v1(1430,315) ; v1(1525,20) C19.2 v1(1525,90) C13.2 v1(1525,165)
  Bottom Layer w50: U6.5 v1(1275,10)
  other v1: 1403.75,276.25
H750_3.3V: C7.1 C20.2 C23.1 C24.2 C30.2 C31.1 J1.5 J1.39 R4.2 R15.1 U2.2 U2.4 U6.1 | length 5772.7
  Top Layer w15: v1(1605,-540) 1605,-574.01 1641.49,-610.5 1700.14,-610.5 1735,-575.64
  Top Layer w20: v1(1090,190) 1203,190 v1(1208,185) ; v1(2410,95) 2424.42,95 2445,115.58 v1(2445,280)
  Top Layer w30: 1735,-575.64 v1(1735,-540) 1735,210 1760,235 1980,235 2025,280 v1(2445,280) ; v2(3050,325) 3400,325 3550,475 v2(3550,480)
  Bottom Layer w10: R4.2 v1(1090,190) ; J1.39 2254.45,-443.38 C31.1 C30.2 ; J1.5 2235.91,225.91 ; R15.1 v1(2410,95)
  Bottom Layer w15: C20.2 v1(1605,-540) ; 2235.91,225.91 2265,255 C24.2 ; C23.1 C24.2 ; v1@2440,280 2433.5,286.5 2353.92,286.5 2342.42,275 2303.08,275 2289.5,288.58 2289.5,290.5 C24.2
  Bottom Layer w20: v1(1208,185) 1208,-315 1237.8,-344.8 1529.8,-344.8 1575,-390 U6.1 C20.2 ; v1(1735,-540) 1738,-537 1901.6,-537 1902.3,-537.7 1985,-455 2057,-455 2097,-495 2247.17,-495 C30.2
  Bottom Layer w30: v1@2440,280 v1(2445,280) 3005,280 v2(3050,325) ; v2(3550,480) C7.1 3550.55,565.55 U2.4
KEY_X1: JP1.3 M1.A71 M1.A72 | length 803.4
  Bottom Layer w8: M1.A72 M1.A71 4871.71,-158.29 4890,-140 5245,-140 5257,-152 JP1.3
KEY_X2: JP1.4 M1.A69 M1.A70 | length 959.8
  Bottom Layer w8: JP1.4 5276.69,-149.07 5251.63,-124 4883.37,-124 4868.76,-138.61 M1.A69 ; M1.A69 M1.A70 M1.A69
KEY_X3: JP1.5 M1.A67 M1.A68 | length 858.9
  Bottom Layer w8: M1.A68 M1.A67 4865.83,-118.92 4879.75,-105 5255.25,-105 5296.37,-146.12 JP1.5
KEY_X4: JP1.6 M1.A65 M1.A66 | length 1015.3
  Bottom Layer w8: JP1.6 5316.06,-143.18 5261.88,-89 4873.12,-89 4862.88,-99.24 M1.A65 ; M1.A65 M1.A66 M1.A65
KEY_X5: JP1.7 M1.A63 M1.A64 | length 911.9
  Bottom Layer w8: M1.A64 M1.A63 4859.94,-79.55 4866.49,-73 5268.51,-73 5335.74,-140.23 JP1.7
KEY_X6: JP1.8 M1.A61 M1.A62 | length 1071.9
  Bottom Layer w8: JP1.8@5353.65,-186.4 JP1.8 5355.43,-135.43 5277,-57 4859.86,-57 4856.99,-59.87 M1.A61 ; M1.A61 M1.A62 M1.A61
KEY_X7: JP1.9 M1.A59 M1.A60 | length 966.7
  Bottom Layer w8: M1.A60 M1.A59 5282.81,-40.18 5375.11,-132.49 JP1.9
KEY_X8: JP1.10 M1.A57 M1.A58 | length 1126.2
  Bottom Layer w8: M1.A57 5285.75,-20.5 5394.8,-129.55 JP1.10 ; M1.A58 M1.A57 M1.A58
KEY_Y1: JP1.13 M1.A51 M1.A52 | length 1084.9
  Bottom Layer w8: M1.A52 M1.A51 5294.58,38.56 5453.85,-120.72 JP1.13
KEY_Y2: JP1.14 M1.A49 M1.A50 | length 1244.4
  Bottom Layer w8: JP1.14 5473.54,-117.78 5297.52,58.24 M1.A49 ; M1.A49 M1.A50 M1.A49
KEY_Y3: JP1.15 M1.A43 M1.A44 | length 1160.4
  Bottom Layer w8: M1.A44 M1.A43 5261.09,117.3 5493.22,-114.83 JP1.15
KEY_Y4: JP1.16 M1.A41 M1.A42 | length 1319.9
  Bottom Layer w8: JP1.16 5512.91,-111.89 5264.04,136.98 M1.A41 ; M1.A41 M1.A42 M1.A41
LEDA: C4.1 D1.K J1.1 | length 619.7
  Bottom Layer w10: J1.1 2184.19,304.65 2215,335.46 2215,403.84 2241.16,430 2340,430 2355,445 2355,605 C4.1@2385,635 ; C4.1 2470.83,635 D1.K
  Bottom Layer w12: C4.1@2385,635 C4.1
LEDK: J1.2 J1.3 R?.2 U1.1 | length 730.2
  Bottom Layer w10: J1.3 2185,265.28 2190,270.28 2190,284.97 ; J1.2 2190,284.97 ; U1.1 2594.41,534.41 2575,515 2470,515 2455,500 2455,435 2450,430 2425,430 2410,415 R?.2 2400,395 2386,409 2245.62,409 2234,397.38 2234,329 2190,285
LTDC_B3: J1.16 J1.17 M1.B65 M1.B66 | length 1191.8
  Bottom Layer w8: J1.17 2180,-10.31 ; J1.16 2180.12,9.37 2185,4.49 2185,-5.31 2180,-10.31 ; M1.B65 M1.B66 2555.65,-101.24 2511.85,-57.44 2273.21,-57.44 2226.07,-10.31 2180,-10.31
LTDC_B4: J1.18 M1.B67 M1.B68 | length 1137.9
  Bottom Layer w8: J1.18 2223.14,-30 2266.58,-73.44 2505.22,-73.44 2552.7,-120.92 M1.B68 M1.B67
LTDC_B5: J1.19 M1.B69 M1.B70 | length 1137.9
  Bottom Layer w8: J1.19 2220.19,-49.68 2259.95,-89.44 2498.6,-89.44 2549.76,-140.61 M1.B70 M1.B69
LTDC_B6: J1.20 M1.B71 M1.B72 | length 1137.9
  Bottom Layer w8: J1.20 2217.25,-69.37 2253.32,-105.44 2491.97,-105.44 2546.82,-160.29 M1.B72 M1.B71
LTDC_B7: J1.21 M1.B73 M1.B74 | length 1137.9
  Bottom Layer w8: J1.21 2214.3,-89.05 2246.7,-121.44 2485.34,-121.44 2543.88,-179.98 M1.B74 M1.B73
LTDC_CLK: M1.B57 M1.B58 R17.1 | length 885
  Bottom Layer w8: R17.1 2403.44,6.56 2538.36,6.56 2567.42,-22.5 M1.B58 M1.B57
LTDC_DE: J1.13 M1.B59 M1.B60 | length 1146.1
  Bottom Layer w8: J1.13 2175.56,68.43 2177.34,66.65 2217,66.65 2293.09,-9.44 2531.73,-9.44 2564.47,-42.18 M1.B60 M1.B59
LTDC_G2: J1.22 M1.B75 M1.B76 | length 1137.9
  Bottom Layer w8: J1.22 2151.77,-110.51 2213.14,-110.51 2240.07,-137.44 2478.72,-137.44 2540.94,-199.66 M1.B76 M1.B75
LTDC_G3: J1.23 M1.B77 M1.B78 | length 1140.5
  Bottom Layer w8: J1.23@2151.78,-130.2 J1.23 2208.42,-128.42 2235,-155 2473.65,-155 2537.99,-219.35 M1.B78 M1.B77
LTDC_G4: J1.24 M1.B79 M1.B80 | length 1137.9
  Bottom Layer w8: J1.24 2205.48,-148.11 2229.4,-172.03 2468.05,-172.03 2535.05,-239.03 M1.B80 M1.B79
LTDC_G5: J1.25 M1.B81 M1.B82 | length 1137.9
  Bottom Layer w8: J1.25 2202.54,-167.79 2224.75,-190 2463.39,-190 2532.11,-258.72 M1.B82 M1.B81
LTDC_G6: J1.26 M1.B83 M1.B84 | length 1137.9
  Bottom Layer w8: J1.26 2199.6,-187.48 2219.92,-207.8 2458.57,-207.8 2529.17,-278.4 M1.B84 M1.B83
LTDC_G7: J1.27 M1.B85 M1.B86 | length 1137.9
  Bottom Layer w8: J1.27 2196.65,-207.16 2214.96,-225.47 2453.61,-225.47 2526.22,-298.09 M1.B86 M1.B85
LTDC_HSYNC: J1.15 M1.B63 M1.B64 | length 1146.1
  Bottom Layer w8: J1.15 2209.33,29.06 2279.83,-41.44 2518.48,-41.44 2558.59,-81.55 M1.B64 M1.B63
LTDC_R3: J1.28 J1.29 M1.B87 M1.B88 | length 1183.1
  Bottom Layer w8: J1.29 2183.47,-246.53 2188.17,-241.83 ; J1.28 2181.85,-226.85 2188.17,-233.17 2188.17,-241.83 ; M1.B87 M1.B88 2523.28,-317.77 2447.34,-241.83 2188.17,-241.83
LTDC_R4: J1.30 M1.B89 M1.B90 | length 1136.7
  Bottom Layer w8: J1.30 2191.36,-266.22 2199.75,-257.83 2440.71,-257.83 2520.34,-337.46 M1.B90 M1.B89
LTDC_R5: J1.31 M1.B91 M1.B92 | length 1139.8
  Bottom Layer w8: J1.31 2194.3,-285.9 2206.37,-273.83 2434.08,-273.83 2517.4,-357.14 M1.B92 M1.B91
LTDC_R6: J1.32 M1.B93 M1.B94 | length 1272.8
  Bottom Layer w8: J1.32 2197.24,-305.59 2213,-289.83 2427.46,-289.83 2514.45,-376.83 M1.B94 ; M1.B94 M1.B93 M1.B94
LTDC_R7: J1.33 M1.B95 M1.B96 | length 1145.9
  Bottom Layer w8: J1.33 2202.31,-325.27 2221.75,-305.83 2420.83,-305.83 2511.51,-396.51 M1.B96 M1.B95
LTDC_VSYNC: J1.14 M1.B61 M1.B62 | length 1146.1
  Bottom Layer w8: J1.14 2151.77,46.97 2214.05,46.97 2286.46,-25.44 2525.11,-25.44 2561.53,-61.87 M1.B62 M1.B61
NetC5_1: C5.1 U1.2 | length 70.7
  Bottom Layer w10: C5.1 2555,560 U1.2
NetC21_1: C21.1 D2.2 R9.2 R10.1 U6.6 | length 366.2
  Bottom Layer w20: R10.1 1360,230 D2.2 R9.2 1375,125 C21.1 U6.6
NetC21_2: C21.2 D2.1 R6.1 R9.1 U6.7 | length 386.9
  Bottom Layer w20: U6.7 1475,5 C21.2 1430,125 R9.1 D2.1 1450,235 R6.1
NetD1_A: D1.A L1.2 U1.4 | length 359.5
  Bottom Layer w20: D1.A 2670,655 2705,620 2705,595 2840.2,595 L1.2 L1.2@2835,655
NetJ1_6: J1.6 M1.B41 M1.B42 R14.2 | length 1159.4
  Bottom Layer w8: J1.6 2276.23,206.23 2305,235 R14.2 2362,203 2432,203 2500.02,134.98 M1.B42 M1.B41 ; R14.2@2325.94,249.06 R14.2@2330,245
NetJ1_9: J1.9 M1.B43 M1.B44 | length 1146.5
  Bottom Layer w8: J1.9 2257.17,147.17 2297,187 2414.97,187 2486.67,115.3 M1.B44 M1.B43
NetJ1_10: J1.10 R16.2 | length 195.5
  Bottom Layer w8: J1.10 2292.49,127.49 R16.2@2330,165
NetJ1_11: J1.11 M1.B37 M1.B38 R15.2 | length 1252.8
  Top Layer w8: v1(3005,50) 3005,170 v1(3020,185)
  Bottom Layer w8: J1.11 2322.2,107.8 R15.2@2330,100 ; R15.2 2368,57 2413,57 2420,50 v1(3005,50) ; v1(3020,185) 3050,185 3060.65,174.35 M1.B38 M1.B37
NetJ1_12: J1.12 R17.2 | length 206.1
  Bottom Layer w8: J1.12 2226.88,88.12 2290,25 R17.2
NetJ1_35: J1.35 M1.B107 M1.B108 | length 1238.9
  Top Layer w8: v1(2370,-340) 2370.56,-340.56 v1(2370.56,-409.44)
  Bottom Layer w8: J1.35 2185.56,-364.64 2228.37,-321.83 2351.83,-321.83 v1(2370,-340) ; v1(2370.56,-409.44) 2370.56,-410.56 2474.62,-514.62 M1.B108 M1.B107
NetJ1_36: J1.36 M1.B103 M1.B104 | length 1176.5
  Bottom Layer w8: J1.36 2188.5,-384.33 2235,-337.83 2332.83,-337.83 2360,-365 2390,-365 2500.25,-475.25 M1.B104 M1.B103
NetJ1_37: J1.37 R18.2 | length 117.9
  Bottom Layer w8: J1.37 2195.99,-404.01 2227.17,-372.83 R18.2
NetJ1_38: J1.38 M1.B109 M1.B110 | length 1159.2
  Bottom Layer w8: J1.38 2206.3,-423.7 2222.17,-407.83 2337.83,-407.83 2464.31,-534.31 M1.B110 M1.B109
NetJP1_17: JP1.17 M1.A35 M1.A36 | length 1235.8
  Bottom Layer w8: M1.A36 M1.A35 5227.61,196.04 5532.59,-108.95 JP1.17
NetM1_A13: M1.A13 M1.A14 R11.2 | length 406.5
  Bottom Layer w10: R11.2 4335,305 4375,305 4395,325 4395,375 4432.57,412.57 M1.A14 M1.A13
NetM1_A15: M1.A15 M1.A16 R12.2 | length 406.6
  Bottom Layer w10: R12.2 4337,287 4382.46,287 4413,317.54 4413,367.54 4438.35,392.89 M1.A16 M1.A15
NetM1_A19: M1.A19 M1.A20 | length 129.9
  Bottom Layer w8: M1.A20 M1.A19
NetM1_A21: M1.A21 M1.A22 | length 259.8
  Bottom Layer w8: M1.A22 M1.A21 M1.A22
NetM1_A23: M1.A23 M1.A24 | length 129.9
  Bottom Layer w8: M1.A24 M1.A23
NetM1_A25: M1.A25 M1.A26 | length 259.8
  Bottom Layer w8: M1.A26 M1.A25 M1.A26
NetM1_A31: M1.A31 M1.A32 | length 129.9
  Bottom Layer w8: M1.A32 M1.A31
NetM1_A37: M1.A37 M1.A38 | length 259.8
  Bottom Layer w8: M1.A38 M1.A37 M1.A38
NetM1_A39: M1.A39 M1.A40 | length 129.9
  Bottom Layer w8: M1.A40 M1.A39
NetM1_A47: M1.A47 M1.A48 | length 129.9
  Bottom Layer w8: M1.A48 M1.A47
NetM1_A73: M1.A73 M1.A74 | length 259.8
  Bottom Layer w8: M1.A74 M1.A73 M1.A74
NetM1_A77: M1.A77 M1.A78 | length 259.8
  Bottom Layer w8: M1.A78 M1.A77 M1.A78
NetM1_A79: M1.A79 M1.A80 | length 129.9
  Bottom Layer w8: M1.A80 M1.A79
NetM1_A85: M1.A85 M1.A86 | length 259.8
  Bottom Layer w8: M1.A86 M1.A85 M1.A86
NetM1_A87: M1.A87 M1.A88 | length 129.9
  Bottom Layer w8: M1.A88 M1.A87
NetM1_A89: M1.A89 M1.A90 | length 259.8
  Bottom Layer w8: M1.A90 M1.A89 M1.A90
NetM1_A91: M1.A91 M1.A92 | length 129.9
  Bottom Layer w8: M1.A92 M1.A91
NetM1_A95: M1.A95 M1.A96 | length 129.9
  Bottom Layer w8: M1.A96 M1.A95
NetM1_A97: M1.A97 M1.A98 | length 259.8
  Bottom Layer w8: M1.A98 M1.A97 ; M1.A98 M1.A97
NetM1_A99: M1.A99 M1.A100 | length 129.9
  Bottom Layer w8: M1.A100 M1.A99
NetM1_A101: M1.A101 M1.A102 | length 259.8
  Bottom Layer w8: M1.A102 M1.A101 M1.A102
NetM1_A103: M1.A103 M1.A104 | length 129.9
  Bottom Layer w8: M1.A104 M1.A103
NetM1_A105: M1.A105 M1.A106 | length 259.8
  Bottom Layer w8: M1.A106 M1.A105 M1.A106
NetM1_A107: M1.A107 M1.A108 | length 129.9
  Bottom Layer w8: M1.A108 M1.A107
NetM1_A109: M1.A109 M1.A110 | length 259.8
  Bottom Layer w8: M1.A110 M1.A109 M1.A110
NetM1_A113: M1.A113 M1.A114 | length 259.8
  Bottom Layer w8: M1.A114 M1.A113 M1.A114
NetM1_B3: M1.B3 M1.B4 | length 129.9
  Bottom Layer w8: M1.B4 M1.B3
NetM1_B5: M1.B5 M1.B6 P1.5 | length 2125.7
  Bottom Layer w8: M1.B6 M1.B5 3368.57,489.31 3459.88,398 4182.75,398 4449.75,665 4765,665 4830,600 5000,600 P1.5
NetM1_B7: M1.B7 M1.B8 P1.4 | length 2232.4
  Bottom Layer w8: M1.B8 M1.B7 3365.62,469.63 3453.25,382 4189.37,382 4456.37,649 4756.96,649 4823.96,582 5082,582 P1.4
NetM1_B9: M1.B9 M1.B10 P1.3 | length 2337.6
  Bottom Layer w8: M1.B10 M1.B9 3362.68,449.94 3446.63,366 4196,366 4463,633 4747.5,633 4814.5,566 5166,566 P1.3
NetM1_B11: M1.B11 M1.B12 P1.2 | length 2442.7
  Bottom Layer w8: M1.B12 M1.B11 3359.74,430.26 3440,350 4205,350 4472,617 4737.92,617 4804.92,550 5250,550 P1.2
NetM1_B19: M1.B19 M1.B20 | length 129.9
  Bottom Layer w8: M1.B20 M1.B19
NetM1_B21: M1.B21 M1.B22 | length 259.8
  Bottom Layer w8: M1.B22 M1.B21 M1.B22
NetM1_B23: M1.B23 M1.B24 | length 129.9
  Bottom Layer w8: M1.B24 M1.B23
NetM1_B25: M1.B25 M1.B26 | length 259.8
  Bottom Layer w8: M1.B26 M1.B25 M1.B26
NetM1_B27: M1.B27 M1.B28 | length 129.9
  Bottom Layer w8: M1.B28 M1.B27
NetM1_B35: M1.B35 M1.B36 | length 129.9
  Bottom Layer w8: M1.B36 M1.B35
NetM1_B39: M1.B39 M1.B40 R16.1 | length 965.6
  Top Layer w8: v1(3035,90) 3035,155 v1(3040,160)
  Bottom Layer w8: R16.1@2385,165 2405,165 2480,90 v1(3035,90) ; v1(3040,160) 3050,160 3055.33,154.67 M1.B40 M1.B39
NetM1_B47: M1.B47 M1.B48 | length 241.1
  Bottom Layer w8: M1.B48 M1.B47
  Bottom Layer w10: 3017,73 3025,65 3050,65 3060.93,75.93 M1.B48
NetM1_B49: M1.B49 M1.B50 | length 259.8
  Bottom Layer w8: M1.B50 M1.B49 M1.B50
NetM1_B51: M1.B51 M1.B52 | length 129.9
  Bottom Layer w8: M1.B52 M1.B51
NetM1_B55: M1.B55 M1.B56 | length 129.9
  Bottom Layer w8: M1.B56 M1.B55
NetM1_B97: M1.B97 M1.B98 U1.5 | length 1844.5
  Top Layer w8: v1(2730,560) 2730,360 v1(2735,355) ; v1(2970,360) v1(3355,360)
  Bottom Layer w8: U1.5 v1(2730,560) ; v1(2735,355) 2961.75,355 2966.75,360 v1(2970,360) ; M1.B98 M1.B97 3313.8,-416.2 3345,-385 3345,205 3355,215 v1(3355,360)
NetM1_B101: M1.B101 M1.B102 | length 259.8
  Bottom Layer w8: M1.B102 M1.B101 M1.B102
NetM1_B105: M1.B105 M1.B106 R18.1 | length 990.9
  Bottom Layer w8: R18.1 2322.17,-385 2385,-385 2494.94,-494.94 M1.B106 M1.B105
NetM1_B113: M1.B113 M1.B114 | length 129.9
  Bottom Layer w8: M1.B114 M1.B113
NetM1_B115: M1.B115 M1.B116 | length 129.9
  Bottom Layer w8: M1.B116 M1.B115
NetM1_B117: M1.B117 M1.B118 | length 129.9
  Bottom Layer w8: M1.B118 M1.B117
NetR7_1: R7.1 U6.2 | length 110
  Bottom Layer w10: R7.1@1475,-550 U6.2
NetR8_1: R8.1 U6.3 | length 110
  Bottom Layer w10: R8.1@1375,-550 U6.3
PB5: M1.A117 M1.A118 R7.2 | length 3377.5
  Top Layer w8: v1(2980,-600) v1(3325,-600)
  Bottom Layer w8: R7.2 1513.89,-595 1544.89,-626 1719,-626 1739,-606 2934.89,-606 2940.89,-612 2968,-612 v1(2980,-600) ; v1(3325,-600) 3405,-680 4270,-680 4338.95,-611.05 M1.A118 ; M1.A118 M1.A117 M1.A118
PB13: M1.A115 M1.A116 R8.2 | length 3369
  Top Layer w8: v1(2950,-590) 2962,-578 3338,-578 v1(3360,-600)
  Bottom Layer w8: R8.2@1375,-605 1412,-568 1603,-568 1645,-610 1705,-610 1725,-590 v1(2950,-590) ; v1(3360,-600) 3424,-664 4263.37,-664 4336,-591.37 M1.A116 M1.A115
REF3V3: M1.A17 M1.A18 | length 129.9
  Bottom Layer w8: M1.A18 M1.A17
RESET: M1.A83 M1.A84 | length 129.9
  Bottom Layer w8: M1.A84 M1.A83
USB_5V: C17.2 C18.2 R2.2 U7.6 USB1.1 | length 502
  Bottom Layer w20: USB1.1 C18.2@855,94.41 ; R2.2 C17.2 C18.2 C18.2@855,94.41 ; U7.6@902.72,150.78 902.72,142.72 890,130 875,130 855,110 C18.2@855,94.41
USB_H_D_N: R11.1 U7.2 USB1.2 | length 5680.6
  Top Layer w10: v1@2935,-656.29 v1(2935,-659) 2906.47,-659 2866.84,-619.36 2866.84,-555.99 2945.33,-477.5 3327.5,-477.5 v1(3345,-460)
  Bottom Layer w10: USB1.2 588.86,219.41 784.41,219.41 800,235 ; U7.2 819.68,175.32 810,185 810,225 800,235 ; v1(2935,-659) 2933.09,-660.91 2925.23,-660.91 2910.95,-675.19 2873.41,-675.19 2848.22,-650 1790,-650 1775,-665 1286.72,-665 1240,-618.28 1240,-550.36 1165,-475.36 1165,251.72 1126.72,290 855,290 800,235 ; v1(3345,-460) 3370,-435 3370,195 3485,310 4235,310 R11.1
USB_H_D_P: R12.1 U7.1 USB1.3 | length 5634.1
  Top Layer w10: v1(770,245) 785,230 v1(785,190) ; v1(2915,-635) 2886.84,-606.84 2886.84,-564.27 2953.61,-497.5 3342.5,-497.5 v1(3375,-465)
  Bottom Layer w10: USB1.3 593.86,240 766.72,240 836.72,310 1135,310 1185,260 1185,-460 1260,-535 1260,-610 1295,-645 1765,-645 1780,-630 2856.5,-630 2881.69,-655.19 2902.67,-655.19 2913.09,-644.77 2913.09,-636.91 v1(2915,-635) ; v1(785,190) 785,175 804.36,155.64 U7.1 ; v1@3373,-463 v1(3375,-465) 3390,-450 3390,185 3492,287 4228,287 R12.1
USB_ID: R13.1 U7.3 | length 188.3
  Bottom Layer w10: U7.3 860,230 880,250 R13.1
USB_O\C\: M1.B17 M1.B18 R4.1 U4.3 | length 4183.7
  Top Layer w8: v1(1920,-675) v1(1920,-420) ; v1(1935,280) 1975,280 2002,307 2382,307 2393,318 v1(2415,318)
  Bottom Layer w8: U4.3 970,71.61 970,170 980,180 R4.1@1005,180 ; R4.1 1040,155 1107.63,155 1141,121.63 1141,-491 1210,-560 1210,-635 1265,-690 1905,-690 v1(1920,-675) ; v1(1920,-420) 1920,265 v1(1935,280) ; v1(2415,318) 2417,318 2426,309 2984,309 3046.2,371.2 M1.B18 M1.B17
USB_VBUS: R2.1 U4.1 | length 86.1
  Bottom Layer w20: R2.1 911.81,-28.19 U4.1
USB_VBUS_DRV: M1.B15 M1.B16 R5.1 U4.4 | length 4064.3
  Top Layer w8: v1(1950,-680) v1(1950,-435) ; v1(1965,305) 1983,323 2375.37,323 2392.37,340 v1(2395,340)
  Bottom Layer w8: 1075,135 1105,135 1125,115 1125,-500 1190,-565 1190,-637.63 1258.37,-706 1924,-706 v1(1950,-680) ; v1(1950,-435) 1950,245 1965,260 v1(1965,305) ; v1(2395,340) 2430,340 2445,325 2975,325 3040.89,390.89 M1.B16 M1.B15
  Bottom Layer w10: 1075,135 R5.1 1080.39,99.61 U4.4
pads on no net: J1.7 J1.8 J1.41 J1.42 JP1.25 JP1.26 USB1.5 USB1.6

## Polygon pours and split planes (outlines as drawn)
GND on Top Layer "GND_L01_P001" (solid, remove dead copper, pour order 1): 750,310 750,-25 ccw(c825,-25) 825,-100 910,-100 cw(c910,-155) 965,-155 965,-460 ccw(c980,-460) 980,-475 1063.58,-475 cw(c1063.58,-575) 1134.29,-504.29 1155.71,-525.71 cw(c1085,-596.42) 1185,-596.42 1185,-619.64 ccw(c1270.36,-619.64) 1210,-680 1231.72,-701.72 ccw(c1300,-633.43) 1300,-730 5620,-730 ccw(c5620,-650) 5700,-650 5700,630 ccw(c5600,630) 5600,730 1825,730 ccw(c1825,630) 1725,630 1725,-556.32 cw(c1670.82,-556.32) 1670.82,-610.5 cw(c1670.82,-564.68) 1625,-564.68 1625,-320 ccw(c1590,-320) 1590,-285 1320,-285 cw(c1320,-185) 1220,-185 1220,220 ccw(c1120,220) 1120,320 773.38,320 ccw(c773.38,295.16) 748.54,295.16
GND_CAN on Top Layer "GND_CAN_L01_P000" (solid, remove dead copper, pour order 0): 1250,-100 ccw(c1275,-100) 1275,-125 1555,-125 ccw(c1555,-80) 1600,-80 1600,350 ccw(c1550,350) 1550,400 1300,400 ccw(c1300,350) 1250,350
GND on Bottom Layer "GND_L04_P002" (solid, remove dead copper, pour order 2): 750,310 750,-25 ccw(c825,-25) 825,-100 910,-100 cw(c910,-155) 965,-155 965,-460 ccw(c980,-460) 980,-475 1063.58,-475 cw(c1063.58,-575) 1134.29,-504.29 1155.71,-525.71 cw(c1085,-596.42) 1185,-596.42 1185,-619.64 ccw(c1270.36,-619.64) 1210,-680 1231.72,-701.72 ccw(c1300,-633.43) 1300,-730 5620,-730 ccw(c5620,-650) 5700,-650 5700,630 ccw(c5600,630) 5600,730 1825,730 ccw(c1825,630) 1725,630 1725,-556.32 cw(c1670.82,-556.32) 1670.82,-610.5 cw(c1670.82,-564.68) 1625,-564.68 1625,-320 ccw(c1590,-320) 1590,-285 1320,-285 cw(c1320,-185) 1220,-185 1220,220 ccw(c1120,220) 1120,320 773.38,320 ccw(c773.38,295.16) 748.54,295.16

## Keep-outs
Keep-Out Layer:
  lines w10: 1705,-575 cw(c1670,-541.67) 1635,-575 1635,420 cw(c1670,386.67) 1705,420 ; 1706.65,-575 1706.65,420 ; 0,-66.26 ccw(c78.74,-66.26) 78.74,-145 866.14,-145 cw(c866.14,-223.74) 944.88,-223.74 944.88,-649.61 ccw(c1023.62,-649.61) 1023.62,-728.35 5826.77,-728.35 ccw(c5826.77,-649.61) 5905.51,-649.61 5905.51,649.61 ccw(c5826.77,649.61) 5826.77,728.35 78.74,728.35 ccw(c78.74,649.61) 0,649.61 0,-66.26

## Other copper
Bottom Layer:
  pour cut-out: 2745,670 2745,400 2985,400 2985,670
  region net H750_3.3V: 3625,475 ccw(c3650,475) 3650,450 3870,450 ccw(c3870,480) 3900,480 3900,510 cw(c3915,510) 3915,525 3970,525 ccw(c3970,545) 3990,545 3990,590 ccw(c3975,590) 3975,605 3925,605 cw(c3925,630) 3900,630 3900,665 ccw(c3865,665) 3865,700 3650,700 ccw(c3650,675) 3625,675

## Silkscreen, mask and mechanical layers (free items; w line width, h text height)
Top Overlay:
  lines w10: 1898.43,-601.97 1972.05,-601.97 ; 472.44,-87.8 472.44,550 732.28,550 732.28,371.65 732.28,-87.8 472.44,-87.8 ; 1672.05,-576.38 5565.35,-576.38 5565.35,419.69 1672.05,419.69 1672.05,-576.38 ; 1848.43,-601.97 3323.94,-601.97 5595.67,-601.97 5595.67,445.28 1848.43,445.28 1848.43,-601.97 ; 1922.05,-528.35 5522.05,-528.35 5522.05,371.65 1922.05,371.65 1922.05,-528.35
Bottom Overlay:
  text "M1-B" at 3245,625 h30
  text "M1-A" at 4645,625 h30

## Text inside footprints (layer, text, board x,y; h text height)
U7: Route Tool Path "3" at 853.19,187.28 h30 r270; Route Tool Path "2" at 853.19,167.6 h30 r270; Route Tool Path "4" at 882.71,187.28 h30 r270; Route Tool Path "5" at 882.71,167.6 h30 r270; Route Tool Path "1" at 853.19,147.92 h30 r270; Route Tool Path "6" at 882.71,147.92 h30 r270
USB1: Route Tool Path "5" at 630.39,507.15 h30 r270